# Altium PCB microUSB.pcbdoc
Units mil, origin at the board's own origin, x right, y up, seen from the top; angles counter-clockwise.
Board outline 1341.73 x 1319.66 mil, 2 copper layers (Top Layer, Bottom Layer); 1 components, 10 nets, 11 pads, 0 vias.
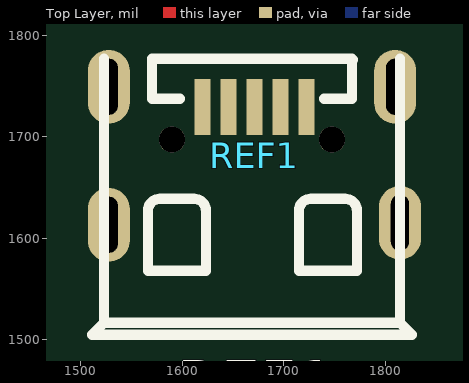
[diagram p0: Top Layer view]
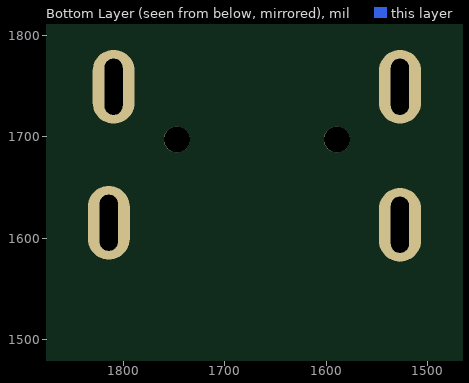
[diagram p1: Bottom Layer view, seen from below]

## Layer stack, top to bottom
Top Solder: solder mask 0.4, Solder Resist, Dk 3.5
Top Layer: signal copper 1.4
Dielectric1: dielectric 12.6, FR-4, Dk 4.8
Bottom Layer: signal copper 1.4
Bottom Solder: solder mask 0.4, Solder Resist, Dk 3.5

## Board outline
2341.73,1000 1000,1000 1000,2319.66 2341.73,2319.66

## Design rules (kind name [scope] priority, off if disabled: settings)
Clearance [All] p1: gap=10
PolygonConnect [All] p1: connectstyle=Relief reliefconductorwidth=10 reliefentries=4 polygonreliefangle="90 Angle" airgapwidth=10
RoutingVias [All] p1: holewidth=28 width=50 viastyle="Through Hole" minholewidth=28 minwidth=50 maxholewidth=28 maxwidth=50
SolderMaskExpansion [All] p1: expansion=4
Width [All] p1: maxlimit=10 minlimit=10 preferedwidth=10
30 further rules are at their usual default settings.

## Components (designator, comment, footprint, x,y, rotation, side; value= is the part's Value field where it differs from the comment)
REF1 "MICRO-USB-SMD_U254-051N-4BH806" MICRO-USB-SMD_U254-051N-4BH806 1670.87,1681.18 r0 top

## Footprints (in the part's own frame and the unit in brackets; to place one, negate y for a bottom-side part, rotate by r counter-clockwise, add the part's x,y. Pads: shape width x height; smd on the part's side, far side on the other; paste and mask are expansions set on the pad)
MICRO-USB-SMD_U254-051N-4BH806 [mm]
  rect 0.4x1.4 smd: 1(-1.3,1.225) 2(-0.65,1.225) 3(0,1.225) 4(0.65,1.225) 5(1.3,1.225)
  oval 1.05x1.849 hole 0.45 slot 1.4 at 90 deg: 6(-3.64,1.725) 7(-3.64,-1.725) 8(3.52,1.725) 9(3.64,-1.675)
  round 0.65 hole 0.65 unplated: ""(-2.06,0.405) ""(1.94,0.405)
  silkscreen extent -4.06,-4.48 3.94,2.42

## Nets (pads, with @x,y where several pads share a name; then routed paths per layer and width w, separated by ;. In a path a pad name is that pad's centre, name@x,y a point inside that pad or via, vN(x,y) a via of type N, cw(c..) or ccw(c..) an arc to the next point about the centre after c; other vN are vias at no path point)
S$87: 
S$89: 
S$91: 
S$98: 
S$100: 
S$102: 
S$104: 
S$109: 
S$112: 
S$117: 
pads on no net: REF1. REF1.1 REF1.2 REF1.3 REF1.4 REF1.5 REF1.6 REF1.7 REF1.8 REF1.9

## Silkscreen, mask and mechanical layers (free items; w line width, h text height)
Document:
  lines w0.1: 1669.87,1658.83 1671.87,1660.83